# EAGLE board e13 (EAGLE 8.7.1)
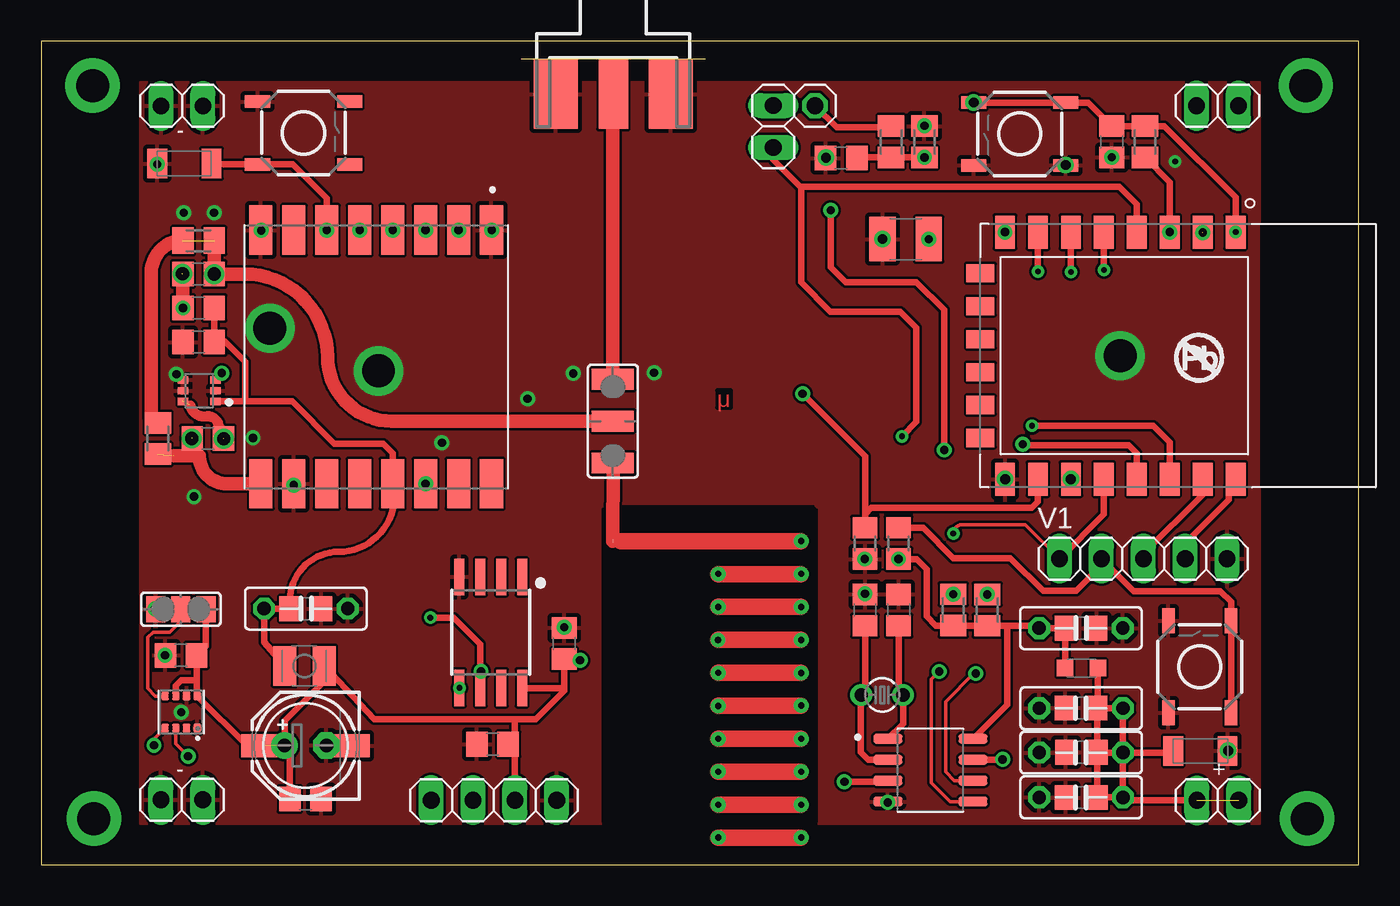
[diagram p0: board, top side]
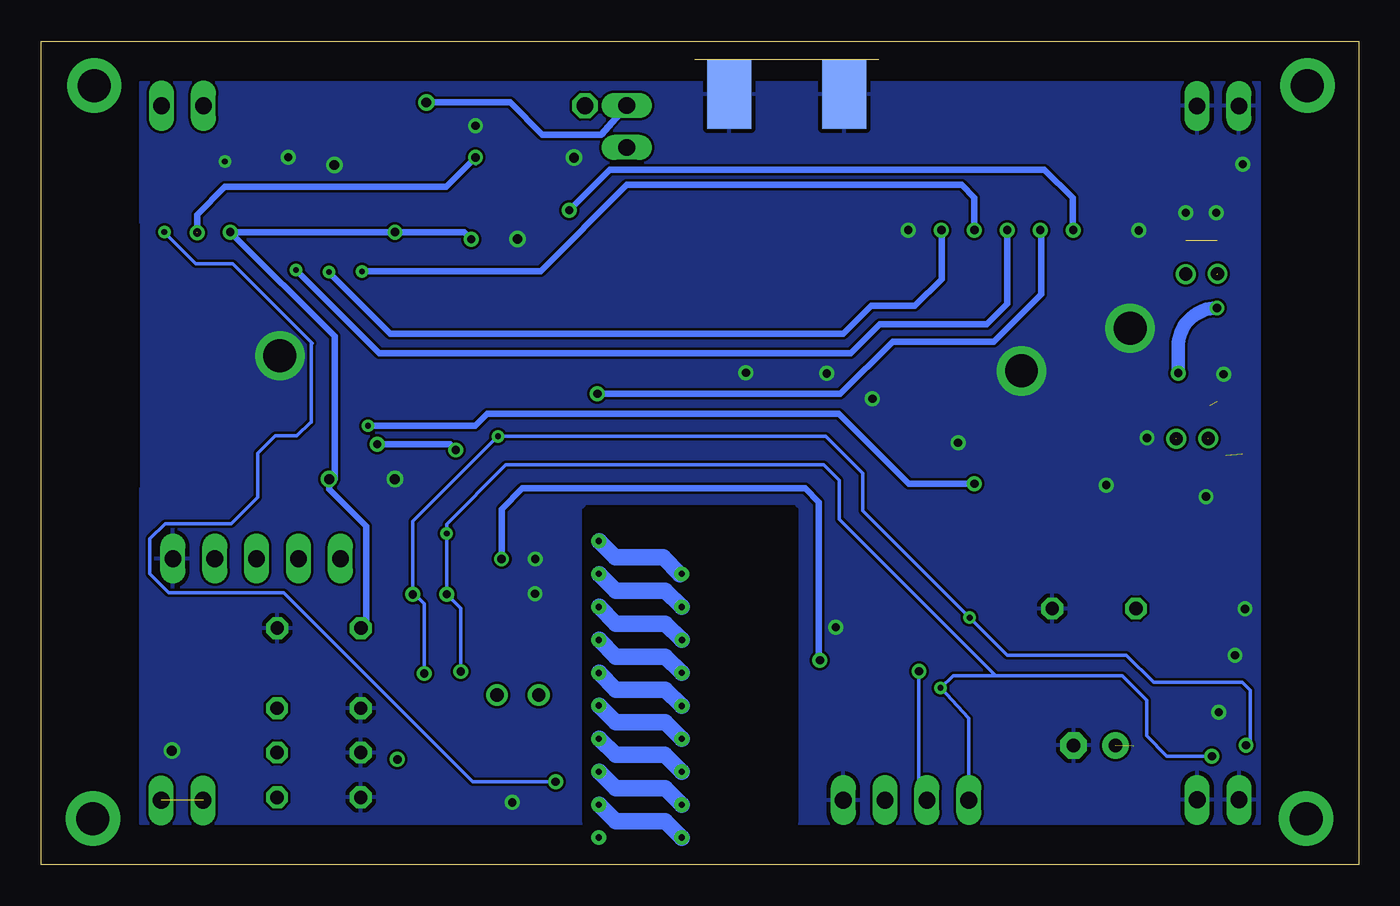
[diagram p1: board, bottom side, seen from below]

Size 80 x 50 mm. Coordinates in mm from the lower left corner, seen from the top.
Outline: 0,0 80,0 80,50 0,50 0,0
Copper layers (1*16): Top 0.035mm / dielectric 1.5mm / Bottom 0.035mm
Design rules "default *": minimum track width 6mil, minimum drill 0.35mm, track to track 6mil, track to pad 6mil, pad to pad 6mil, via to via 6mil, smd to smd 6mil, copper to edge 40mil, drill to drill 6mil, minimum pad ring 10mil, minimum via ring 8mil, stop-mask expansion 4mil, vias tented up to drill 0mil, thermal gap 10mil

## Footprints (pad centres in the part's own frame; a part is rotated, then mirrored left to right if it is on the bottom)
C0805 = smd 1.3 x 1.5: 1 -0.95,0; 2 0.95,0
C050-025X075 = drill 0.813 octagon: 1 -2.54,0; 2 2.54,0
C1210 = smd 1.6 x 2.7: 1 -1.4,0; 2 1.4,0
E2,5-5 = drill 0.813 pad 1.6: + -1.27,0 | drill 0.813 pad 1.6 octagon: - 1.27,0
PANASONIC_D = smd 3 x 1.4: + 2.4,0; - -2.4,0
1X02 = drill 1.016 long: 1 -1.27,0; 2 1.27,0
1X01_2MM = drill 2 pad 3.302: 1 0,0
1X01 = drill 1.016 octagon: 1 0,0
1X03 = drill 1.016 long: 1 -2.54,0; 2 0,0; 3 2.54,0
1X04 = drill 1.016 long: 1 -3.81,0; 2 -1.27,0; 3 1.27,0; 4 3.81,0
L2012C = smd 1 x 1: 1 -1,0; 2 1,0
L2825P = smd 1.4 x 2.4: 1 -1.2,0; 2 1.2,0
TACTILE_SWITCH_SMD_5.2MM = smd 1.524 x 0.762: 1 -2.794,1.905; 2 2.794,1.905; 3 -2.794,-1.905; 4 2.794,-1.905
TC26V = drill 0.813: 1 -1.27,0; 2 1.27,0
M0805 = smd 1.3 x 1.6: 1 -0.95,0; 2 0.95,0
R0805 = smd 1.3 x 1.5: 1 -0.95,0; 2 0.95,0
CT/CN1206 = smd 1.2 x 1.8: 1 -1.65,0; 2 1.65,0
SJ_2W = smd 1.27 x 2.54: 1 -2.54,0; 2 0,0; 3 2.54,0
SJ_2 = smd 1.168 x 1.6: 1 -1.524,0; 2 0,0; 3 1.524,0
XCVR_ESP8266-12E/ESP-12E = smd 2 x 1.2: 1 -7.5,7; 2 -7.5,5; 3 -7.5,3; 4 -7.5,1; 5 -7.5,-1; 6 -7.5,-3; 7 -7.5,-5; 8 -7.5,-7; 15 7.5,-7; 16 7.5,-5; 17 7.5,-3; 18 7.5,-1; 19 7.5,1; 20 7.5,3; 21 7.5,5; 22 7.5,7 | smd 1.1 x 1.7: 9 -5,-8.5; 10 -3,-8.5; 11 -1,-8.5; 12 1,-8.5; 13 3,-8.5; 14 5,-8.5
PSON65P250X250X100-8N = smd 0.49 x 0.45: 1 0.97,0.975; 2 0.97,0.325; 3 0.97,-0.325; 4 0.97,-0.975; 5 -0.97,-0.975; 6 -0.97,-0.325; 7 -0.97,0.325; 8 -0.97,0.975
SOIC127P600X175-8N = smd 1.75 x 0.59: 1 -2.585,1.905; 2 -2.585,0.635; 3 -2.585,-0.635; 4 -2.585,-1.905; 5 2.585,-1.905; 6 2.585,-0.635; 7 2.585,0.635; 8 2.585,1.905
SO08-EIAJ = smd 0.61 x 2.21: 1 -1.905,-3.378; 2 -0.635,-3.378; 3 0.635,-3.378; 4 1.905,-3.378; 5 1.905,3.353; 6 0.635,3.353; 7 -0.635,3.353; 8 -1.905,3.353
XCVR_RFM95W-915S2 = smd 3 x 1.4: 1 -7.7,7; 2 -7.7,5; 3 -7.7,3; 4 -7.7,1; 5 -7.7,-1; 6 -7.7,-3; 7 -7.7,-5; 8 -7.7,-7; 9 7.7,-7; 10 7.7,-5; 11 7.7,-3; 12 7.7,-1; 13 7.7,1; 14 7.7,3; 15 7.7,5; 16 7.7,7
SOT65P210X85-6N = smd 0.62 x 0.44: 1 -0.99,0.65; 2 -0.99,0; 3 -0.99,-0.65; 4 0.99,-0.65; 5 0.99,0; 6 0.99,0.65
PRINTED8900 = smd 0.203 x 0.016: FEEDPOINT -0.01,0.02 | drill 0.38 pad 0.38: P$1 -0.02,11.47; P$2 1.98,11.47; P$3 3.99,11.47; P$4 5.99,11.47; P$5 8,11.47; P$6 9.98,11.47; P$7 12,11.47; P$8 13.99,11.47; P$9 16,11.47; P$10 17.99,11.47; P$11 1.98,6.43; P$12 3.99,6.43; P$13 6,6.41; P$14 7.99,6.43; P$15 10,6.43; P$16 12,6.43; P$17 13.99,6.43; P$18 16,6.43; P$19 17.99,6.43
J502-ND-142-0711-821/826 = smd 4.191 x 1.778: 1 2.115,0 | smd 4.191 x 2.667: G@1 2.115,3.495; G@2 2.115,-3.495 | smd 4.191 x 2.667 bottom: G@3 2.115,3.495; G@4 2.115,-3.495

## Placement (x,y rotation side)
100PF  [C0805]  9.56,35.86 0 top
100UH  [C0805]  9.56,33.8 0 top
1000PF  [C0805]  9.56,31.73 0 top
C1  [C050-025X075]  63.13,14.36 0 top
C2  [C050-025X075]  63.14,9.5 180 top
C3  [C050-025X075]  63.14,4.09 180 top
C4  [C050-025X075]  63.14,6.81 180 top
C5  10u  [C0805]  63.15,4.08 0 top
C6  1u  [C0805]  63.16,6.83 0 top
C7  100n  [C0805]  63.14,9.52 0 top
C8  100pf  [C0805]  63.13,14.35 180 top
C9  100n  [C0805]  65,43.89 90 top
C10  [C1210]  52.49,37.98 180 top
C11  100n  [C0805]  48.57,42.9 180 top
C12  100n  [C0805]  8.49,12.71 180 top
C13  [E2,5-5]  16.05,7.24 0 top
C14  [C050-025X075]  16.07,15.55 0 top
C15  47uF  [PANASONIC_D]  16.05,7.23 180 top
C16  [C0805]  52.06,15.46 90 top
C17  [C0805]  31.76,13.43 270 top
C18  [C0805]  16.06,15.54 180 top
C19  [C0805]  16.05,3.99 180 top
C20  [C0805]  27.4,7.31 0 top
C21  [C0805]  10.12,25.88 180 top
CLC32  [C0805]  50.02,15.46 90 top
GND  [1X02]  8.55,46.07 0 top
J1  [1X01_2MM]  76.86,2.8 0 top
J2  [1X01_2MM]  76.78,47.3 0 top
J3  [1X01_2MM]  3.2,2.8 0 top
J4  [1X01_2MM]  3.12,47.3 0 top
JP1  [1X02]  71.44,3.91 0 top
JP2  [1X02]  8.54,3.94 0 top
JP3  [1X01]  46.98,46.08 0 top
JP4  [1X03]  69.46,18.58 0 top
JP5  [1X02]  44.45,44.82 270 top
JP6  [1X04]  27.49,3.92 0 top
L1  [L2012C]  63.16,11.94 0 top
L2  [L2825P]  15.98,12.07 180 top
LRST  [TACTILE_SWITCH_SMD_5.2MM]  15.93,44.43 0 top
Q1  [TC26V]  51.06,10.31 0 top
R1  51  [M0805]  51.6,43.89 90 top
R2  22  [M0805]  53.63,43.89 270 top
R3  10k  [M0805]  67.02,43.89 270 top
R4  10k  [R0805]  52.05,19.51 270 top
R5  12k  [R0805]  50.02,19.51 90 top
R6  [M0805]  55.38,15.47 270 top
R7  [M0805]  57.44,15.46 270 top
R8  tvs  [CT/CN1206]  8.69,42.57 180 top
R9  [M0805]  7.09,25.88 90 top
R10  [M0805]  9.56,37.89 180 top
S1  [TACTILE_SWITCH_SMD_5.2MM]  59.41,44.37 180 top
S2  [TACTILE_SWITCH_SMD_5.2MM]  70.34,12.02 90 top
SJ2  [SJ_2W]  34.71,26.93 90 top
SJ3  [SJ_2]  8.48,15.51 0 top
TVS  [CT/CN1206]  70.38,6.91 0 top
U1  ESP8266-12E/ESP-12E  [XCVR_ESP8266-12E/ESP-12E]  65.52,30.91 270 top
U2  BME280  [PSON65P250X250X100-8N]  8.5,9.27 270 top
U3  PCF8523T  [SOIC127P600X175-8N]  53.99,5.74 0 top
U4  I2C EEPROM  [SO08-EIAJ]  27.3,14.09 180 top
U5  RFM95W-915S2  [XCVR_RFM95W-915S2]  20.34,30.83 270 top
U$1  [NO_PB_LOGO_0.120]  68.58,28.88 0 top
U$2  SMA3109  [SOT65P210X85-6N]  9.6,28.78 180 top
U$3  ANTENNAE  [PRINTED8900]  34.68,19.64 270 top
V1  [1X02]  63.1,18.58 0 top
V5  [1X02]  71.42,46.08 0 top
X1  [J502-ND-142-0711-821/826]  34.74,48.89 270 top

## Library data of the parts
100PF 100UH 1000PF C21 R9 R10 = resistor
C1-C14 C16-C20 CLC32 = rcl; SPICEPREFIX: C
C15 = SparkFun-Capacitors; PROD_ID: CAP-08478
GND JP1-JP6 V1 V5 = pinhead
J1-J4 = SparkFun-Connectors
L1 L2 = rcl; SPICEPREFIX: L
LRST S1 S2 = SparkFun-Switches; PROD_ID: SWCH-08247; SF_SKU: COM-08720
Q1 = crystal; OC_FARNELL: unknown; OC_NEWARK: unknown
R1-R7 = rcl; SPICEPREFIX: R
R8 TVS = varistor
SJ2 SJ3 = jumper
U1 = ESP8266-12E_ESP-12E; AVAILABILITY: Unavailable; DESCRIPTION: This WiFi module has a 32-bit MCU micro and clock speeds supporting 80 MHz or 160 MHz. Supports the RTOS and integrated Wi-Fi MAC/BB/RF/PA/LNA, and has an on-board antenna.; MF: AI-Thinker; MP: ESP8266-12E/ESP-12E; PACKAGE: None; PRICE: None
U2 = BME280; AVAILABILITY: Unavailable; DESCRIPTION: Integrated pressure, humidity and temperature sensor; 8-pin 2.5x2.5x0.93mm LGA; MF: Bosch; MP: BME280; PACKAGE: LGA-8 Bosch; PRICE: None
U3 = PCF8523T; AVAILABILITY: Unavailable; DESCRIPTION: NXP Semiconductors Real-Time Clock _RTC_ and calendar; MF: NXP USA; MP: PCF8523T; PACKAGE: VDFN-8 NXP USA; PRICE: None
U4 = SparkFun-IC-Memory; PROD_ID: NA-XXXXX
U5 = RFM95W-915S2; AVAILABILITY: Unavailable; DESCRIPTION: General ISM < 1GHz LoRa™ Transceiver Module 915MHz Surface Mount; MF: RF Solutions; MOUSER-PURCHASE-URL: https://snapeda.com/shop?store=Mouser&id=585488; MP: RFM95W-915S2; PACKAGE: SMD-16 RF Solutions; PRICE: None
U$1 = SparkFun-Aesthetics
U$2 U$3 = microcodes
X1 = con-coax; MF: JOHNSON COMPONENTS; MPN: 142-0711-821; OC_FARNELL: 1019328; OC_NEWARK: 16F3627

## Nets
ADC: C11.1 R1.1 R2.2 U1.2
ADCIN: JP3.1 R1.2
BOOT: R4.1 S2.3 S2.4 V1.2
CLK32: C16.1 Q1.2 U3.1
GND: 1000PF.1 C1.2 C2.2 C3.2 C4.2 C5.1 C6.1 C7.1 C8.1 C9.1 C10.2 C11.2 C12.2 C13.- C14.2 C15.- C16.2 C17.1 C18.1 C19.1 C20.1 CLC32.2 GND.1 GND.2 JP2.1 JP2.2 JP4.3 JP6.4 LRST.1 R2.1 R5.1 R8.2 S1.1 S1.2 S2.1 S2.2 SJ3.1 TVS.2 U1.15 U2.1 U2.7 U3.4 U4.4 U5.1 U5.8 U5.10 U$2.2 U$2.4 U$2.5 X1.G@1 X1.G@2 X1.G@3 X1.G@4
INS: C21.1 U$2.6
IO0: U1.20 U5.14
LNKA: C21.2 R9.1 U5.9
LNKB: 100PF.2 R9.2 R10.1 R10.2 SJ2.2
LOUT: 100PF.1 100UH.1 U$2.3
LRST: LRST.3 R8.1 U1.19 U5.6
LVCC: 100UH.2 1000PF.2 C14.1 C18.2 L2.2 U5.13 U$2.1
MISO: U1.6 U5.2
MOSI: U1.7 U5.3
NSS: R5.2 U1.16 U5.5
PRTNA: SJ2.1 U$3.FEEDPOINT
PULSE: U3.7
RSTDIV: C9.2 JP5.1 R3.1 S1.3 S1.4 U1.1 U3.3
RX: JP4.1 U1.21
SCK: U1.5 U5.4
SCL: JP5.2 JP6.2 R7.1 U1.4 U2.4 U3.6 U4.6
SDA: JP6.1 R6.1 U1.18 U2.3 U3.5 U4.5 V1.1
SDO: SJ3.2 U2.5
SLC32: CLC32.1 Q1.1 U3.2
SMA: SJ2.3 X1.1
TX: JP4.2 U1.22
VCC3: C1.1 C8.2 C10.1 C12.1 C13.+ C15.+ C17.2 C19.2 C20.2 JP6.3 L1.1 L2.1 R3.2 R4.2 R6.2 R7.2 SJ3.3 U1.3 U1.8 U1.17 U2.6 U2.8 U3.8 U4.8
VIN33: C2.1 C3.1 C4.1 C5.2 C6.2 C7.2 JP1.1 JP1.2 L1.2 TVS.1

## Tracks (layer width: path | path; a pad name or v marks a point on that pad's centre or on a via)
ADC  (via drill 0.5)  (1 unrouted)
  Top 0.406: 53.62,42.65 R2.2 R1.1 49.56,42.94 C11.1
  Bottom 0.406: v70.52,38.38 70.52,39.47 68.84,41.15 55.42,41.15 R2.2 53.62,42.64
  other vias: 53.63,42.94
ADCIN
  Top 0.406: R1.2 51.53,44.77 48.29,44.77 JP3.1
BOOT
  Top 0.406: S2.3 S2.4 72.25,15.96 71.59,16.61 66.34,16.61 V1.2 64.37,18.18 62.83,16.64 60.83,16.64 58.85,18.62 55.39,18.62 53.55,20.46 R4.1
CLK32
  Top 0.406: C16.1 52.06,10.58 Q1.2 52.33,8.57 U3.1
GND  (via drill 0.35, 0.5, 0.6, 2)
  other vias: 20.48,29.98 65.51,30.9 53.63,44.86 65,42.95 58.53,23.41 62.2,42.48 68.85,42.69 51.08,37.99 47.65,42.93 13.36,38.51 9.28,22.35 15.33,23.05 6.91,15.53 7.52,12.71 8.51,9.26 31.76,14.42 51.4,3.78 72.07,6.93 27.35,38.53 29.53,28.29 32.31,29.83 37.21,29.87 50.01,18.56 50.02,16.45 24.33,25.62 12.86,25.91 8.21,29.77 13.89,32.57 7.04,42.53 8.65,39.59 10.5,39.59
  pour Top: 6,47.5 6,2.5 74,2.5 74,47.5
  pour Bottom: 6,47.5 6,2.5 74,2.5 74,47.5
INS  (via drill 0.8)  (2 unrouted)
  Top 0.61: C21.1 11.07,26.28 | C21.1 11.07,26.36 | C21.1 10.75,26.78 arc79 10.01,27.22 arc-88 9.06,27.89
  other vias: 11.08,25.86
IO0  (via drill 0.35, 0.5)
  Top 0.406: U1.20 68.52,25.66 67.53,26.65 v60.16,26.65 | 23.34,22.38 U5.14 23.66,23.45 | 23.34,22.38 23.3,22.34 | 23.34,22.38 23.66,22.7 23.66,23.45 | 23.66,24.33 23.66,23.45
  Bottom 0.406: v60.16,26.65 53.66,26.65 52.93,27.38 31.59,27.38 27.34,23.13 U5.14
  other vias: 23.34,23.13
LNKA  (via drill 0.8)  (2 unrouted)
  Top 0.406: C21.2 9.17,25.25 9.59,24.82
  Top 0.813: 8.07,24.82 9.59,24.82 arc90 11.29,23.13 U5.9
  other vias: 9.14,25.88
LNKB  (via drill 0.8)  (1 unrouted)
  Top 0.813: SJ2.2 21.28,26.93 arc-90 17.39,30.82 arc90 12.35,35.86 100PF.2 R10.1 | R10.2 arc90 6.69,35.97 6.69,27.23 arc90 R9.2
  other vias: 10.51,35.86
LOUT  (via drill 0.5, 0.8)  (1 unrouted)
  Top 0.203: U$2.3 10.97,29.81 v10.97,29.85
  Top 0.813: 100UH.1 100PF.1
  Bottom 0.813: v10.97,29.85 10.97,31.44 arc90 100UH.1
  other vias: 8.61,33.8 8.58,35.87
LRST  (via drill 0.5)
  Top 0.406: 10.5,42.02 R8.1 11.1,42.52 LRST.3 15.28,42.52 17.34,40.46 U5.6 | U1.19 66.52,24.98 66.04,25.46 59.66,25.46 v59.6,25.52 | v54.83,25.18 54.83,33.68 53.14,35.37 48.85,35.37 47.94,36.28 v47.94,39.73
  Bottom 0.406: v59.6,25.52 55.17,25.52 v54.83,25.18 | v47.94,39.73 45.47,42.2 19.09,42.2 17.37,40.48 17.37,38.56 U5.6
  other vias: 17.34,38.53
LVCC
  Top 0.406: C14.1 13.53,13.52 L2.2 | 13.27,15.55 C14.1 | C18.2 C14.1 | 15.08,15.57 C18.2 | U$2.1 12.38,28.13 | 12.38,28.13 15.23,28.13 17.79,25.57 20.76,25.57 21.34,24.99 U5.13 arc-14 21.44,22.51 arc-92 18.06,19 arc90 15.11,16.05 C18.2 | 12.38,28.13 12.38,30.55 11.17,31.76 11.14,31.73 1000PF.2 100UH.2
MISO  (via drill 0.35, 0.5)
  Top 0.406: U1.6 v62.52,35.99 v62.53,35.98 | 25.57,37.75 25.57,38.3 U5.2
  Bottom 0.406: v62.53,35.98 58.8,32.25 31.3,32.25 29.61,33.94 26.95,33.94 25.33,35.56 U5.2
  other vias: 25.34,38.53
MOSI  (via drill 0.35, 0.5)
  Top 0.406: U1.7 v60.52,36.02
  Bottom 0.406: U5.3 23.34,40.49 24.12,41.27 44.44,41.27 49.68,36.03 v60.51,36.03 v60.52,36.02
  other vias: 23.34,38.53
N$1
  cutout Top: 34.09,21.32 34.09,2.62 34.21,2.5 46.96,2.5 47.08,2.62 47.08,21.56 46.87,21.77 34.29,21.77 34.12,21.6 34.09,21.57 34.09,21.22
  cutout Bottom: 34.09,21.32 34.09,2.62 34.21,2.5 46.96,2.5 47.08,2.62 47.08,21.56 46.87,21.77 34.29,21.77 34.12,21.6 34.09,21.57 34.09,21.22
N$3
  pour Top: 40.17,29.66 40.17,27.2 40.29,27.08 42.06,27.08 42.21,27.23 42.21,29.61 42.07,29.75 40.23,29.75 40.2,29.72
NSS  (via drill 0.5)
  Top 0.406: U1.16 60.52,22.05 60.13,21.66 50.39,21.66 50.02,21.29 R5.2 50.02,24.81 v46.23,28.6
  Bottom 0.406: v46.23,28.6 31.47,28.6 28.31,31.76 22.16,31.76 19.29,34.63 19.29,38.48 U5.5
  other vias: 19.34,38.53
PRTNA
  Top 0.813: U$3.FEEDPOINT 34.74,24.36 SJ2.1
PULSE  (via drill 0.5)
  Top 0.406: U3.7 58.35,6.38 v58.37,6.39
RSTDIV  (via drill 0.35, 0.5, 0.6)
  Top 0.406: U1.1 72.52,40.51 68.19,44.84 R3.1 C9.2 63.56,46.27 S1.3 S1.4 | U3.3 51.33,5.03 v48.77,5.03
  Bottom 0.203: U1.1 70.61,36.5 68.38,36.5 63.55,31.67 63.59,31.63 63.59,26.86 63.64,26.86 64.47,26.03 64.48,26.04 65.78,26.04 66.85,24.97 66.85,22.32 68.46,20.71 72.48,20.71 73.41,19.78 73.41,17.66 72.25,16.5 65.28,16.5 53.81,5.03 v48.77,5.03
  Bottom 0.406: JP5.1 46,44.33 49.57,44.33 51.53,46.29 56.6,46.29 S1.4
  other vias: 56.62,46.27 72.52,38.41
RX
  Top 0.406: 67.1,18.76 JP4.1 66.92,18.87 70.52,22.47 U1.21
SCK  (via drill 0.35, 0.5)
  Top 0.406: U1.5 v64.52,36.12 v64.53,36.11
  Bottom 0.406: v64.53,36.11 59.46,31.04 30.86,31.04 29.09,32.81 22.6,32.81 21.34,34.07 U5.4
  other vias: 21.34,38.53
SCL  (via drill 0.35, 0.5)
  Top 0.203: U2.4 6.85,7.62 v6.85,7.26 | 56.74,11.48 v56.74,11.61 56.63,11.61 54.92,9.9 54.92,5.63 55.45,5.11 U3.6
  Top 0.406: U1.4 66.52,40.09 65.45,41.16 46.1,41.16 | 46.1,41.16 44.45,42.81 JP5.2 | 46.1,41.16 46.14,41.12 46.14,35.36 47.92,33.58 52.17,33.58 53.14,32.61 53.14,26.88 v52.27,26.01 | v26.7,11.74 26.7,10.78 U4.6 26.66,13.38 25.05,15 v23.63,15
  Bottom 0.203: R7.1 57.44,16.53 | 57.44,16.53 57.44,20.84 v52.27,26.01 32.38,26.01 30.13,23.76 30.13,21.5 v23.63,15 21.36,12.73 14.12,12.73 12.46,11.07 12.44,11.09 7.09,11.09 6.59,10.59 6.59,7.52 v6.85,7.26 | JP6.2 26.7,4.41 v26.7,11.74 | v56.74,11.61 56.74,15.83 57.44,16.53
  other vias: 57.44,16.41
SDA  (via drill 0.35, 0.5)
  Top 0.203: U2.3 8.18,7.33 v8.92,6.59 | v54.53,11.73 54.05,11.25 54.05,4.97 55.19,3.83 U3.5 | V1.1 59.76,20.65 55.93,20.65 arc90 v55.39,20.11 v55.38,20.11
  Top 0.406: V1.1 64.52,21.27 U1.18
  Bottom 0.203: R6.1 | R6.1 v55.38,20.11 55.38,20.68 51.78,24.28 32.5,24.28 31.55,23.33 31.55,20.98 22.04,11.47 | v8.92,6.59 11.65,6.59 12.88,7.82 12.88,9.98 14.37,11.47 22.04,11.47 | 22.04,11.47 24.61,11.47 U4.5 23.68,8.89 JP6.1 | v54.53,11.73 54.53,15.58 R6.1
  other vias: 55.38,16.42 25.39,10.74
SDO
  Top 0.203: SJ3.2 8.48,14.78 7.82,14.12 6.79,14.12 6.47,13.8 6.47,10.71 6.94,10.24 U2.5
SLC32
  Top 0.406: CLC32.1 50.02,10.54 Q1.1 49.76,10.28 49.76,6.83 50.22,6.38 U3.2
SMA
  Top 0.813: SJ2.3 34.71,46.74 X1.1
TX
  Top 0.406: U1.22 72.1,22.99 72.1,22.16 69.46,19.52 JP4.2
VCC3  (via drill 0.5, 0.6)  (1 unrouted)
  Top 0.406: 62.18,13.92 C8.2 | C8.2 C1.1 60.63,14.4 60.52,14.51 58.65,14.51 | R3.2 68.52,41.44 U1.3 | U1.8 58.52,38.72 58.45,38.65 | C8.2 62.18,11.96 L1.1 | 57.91,14.51 R7.2 R6.2 54.31,14.52 53.76,15.07 53.76,17.95 53.17,18.54 52.07,18.54 R4.2 | 57.91,14.51 58.65,14.51 | 57.95,14.47 57.91,14.51 | 9.69,15.2 SJ3.3 10,13.27 C12.1 | 9.69,12.96 C12.1 | C12.1 9.44,11.22 | 9.44,11.22 9.44,10.28 U2.8 12.47,7.24 C13.+ | U2.6 8.18,10.87 8.5,11.19 9.41,11.19 9.44,11.22 | C13.+ 14.78,8.74 16.98,10.94 L2.1 20.23,8.82 28.7,8.82 | 28.7,8.82 30.03,8.82 31.76,10.55 | 31.76,10.7 C17.2 31.83,12.41 v32.72,12.41 | 31.76,10.7 31.76,10.55 | 31.66,10.65 31.76,10.55 | C19.2 15.1,6.92 C13.+ | JP6.3 28.76,7.72 | 28.7,8.82 28.76,8.76 28.76,7.72 | U3.8 58.65,9.72 58.65,14.51 | C20.2 28.76,7.72 | U4.8 29.24,10.7 31.76,10.7
  Bottom 0.406: C10.1 54.32,38.41 U1.8 U1.3 62.18,32.07 62.18,23.4 62.19,23.41 U1.17 62.52,22.81 60.25,20.54 60.25,14.7 C1.1 | R4.2 52.05,21.59 50.78,22.86 33.62,22.86 32.78,22.02 32.78,12.44 32.72,12.38 v32.72,12.41
  other vias: 68.52,38.41 53.89,37.98 58.52,38.41 62.52,23.41 52.05,18.56
VIN33  (1 unrouted)
  Top 0.406: JP1.1 65.86,3.91 C3.1 | C3.1 C4.1 | C4.1 C2.1 64.11,9.5 | 64.11,9.5 C7.2 64.16,9.59 L1.2 | C4.1 64.13,6.81 | 64.13,6.81 C6.2 64.11,9.5 | C3.1 C5.2 64.13,4.11 64.13,6.81 | C4.1 68.63,6.81 TVS.1

## Text on the board
Top: μ
tNames: - | - | +